# EAGLE board Board (EAGLE 8.2.2)
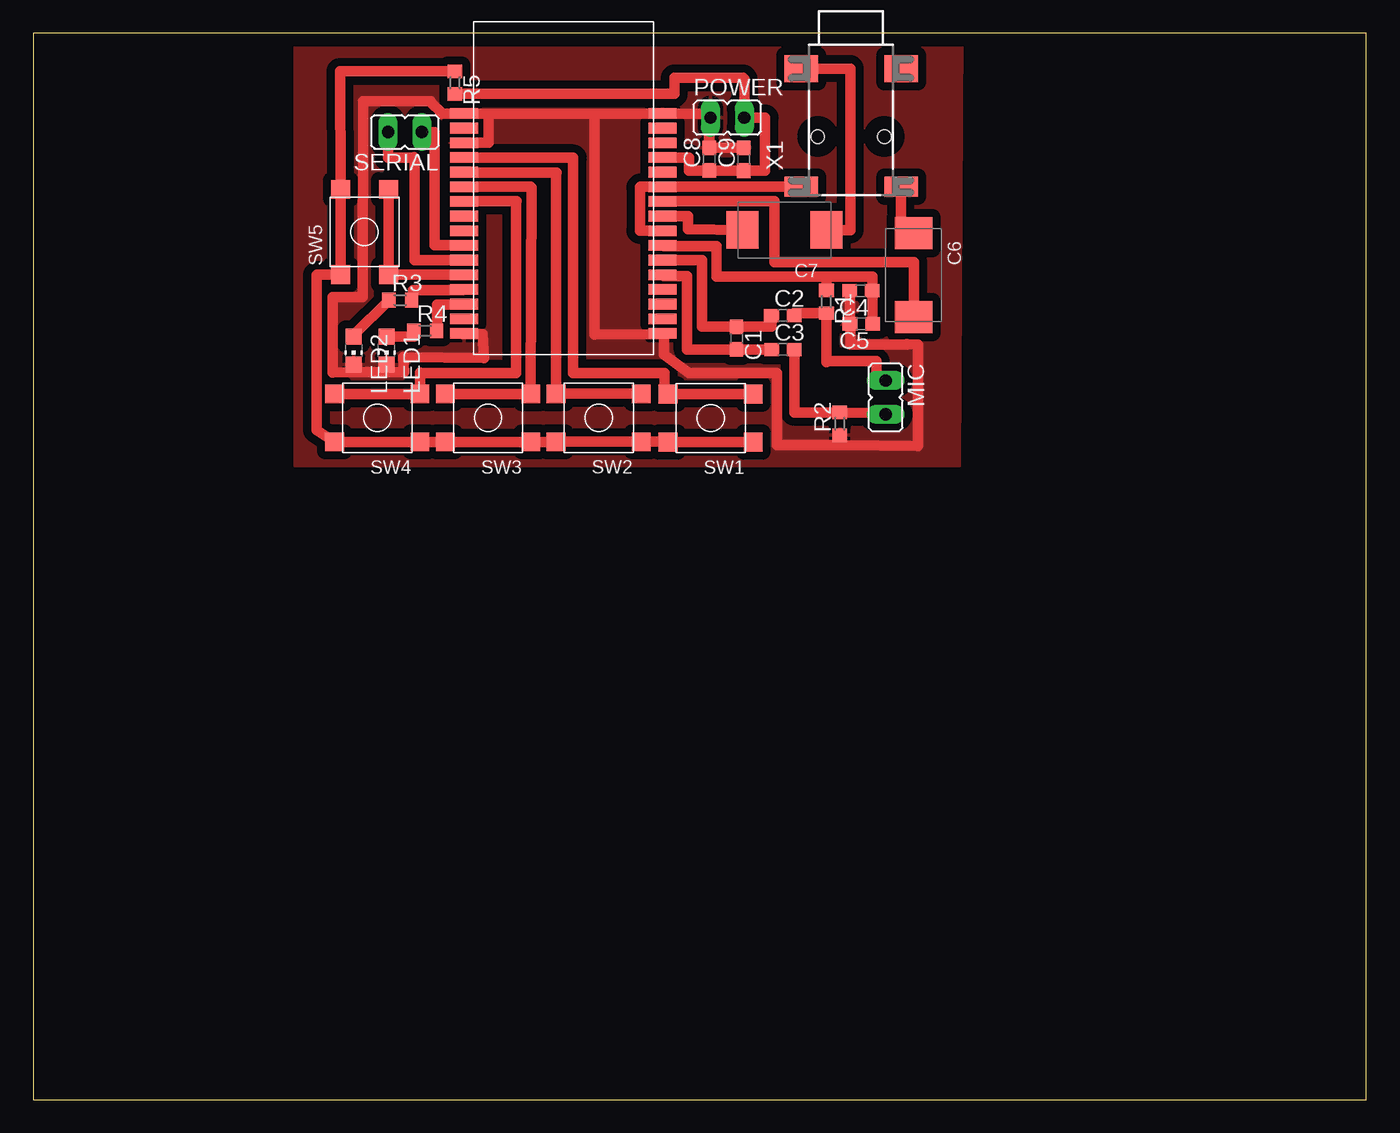
[diagram p0: board, top side]

Size 100 x 80 mm. Coordinates in mm from the lower left corner, seen from the top.
Outline: 0,0 100,0 100,80 0,80 0,0
Copper layers (1*16): Top 0.035mm / dielectric 1.5mm / Bottom 0.035mm
Design rules "default": minimum track width 6mil, minimum drill 0.35mm, track to track 6mil, track to pad 6mil, pad to pad 6mil, via to via 6mil, smd to smd 6mil, copper to edge 40mil, drill to drill 6mil, minimum pad ring 10mil, minimum via ring 8mil, stop-mask expansion 4mil, vias tented up to drill 0mil, thermal gap 10mil

## Footprints (pad centres in the part's own frame; a part is rotated, then mirrored left to right if it is on the bottom)
C0603 = smd 1.1 x 1: 1 -0.85,0; 2 0.85,0
SMC_D = smd 2.4 x 2.8: + -3.15,0; - 3.15,0
CHIP-LED0805 = smd 1.2 x 1.2: A 0,-1.05; C 0,1.05
JP1 = drill 0.914 long: 1 0,-1.27; 2 0,1.27
R0603 = smd 1 x 1.1: 1 -0.85,0; 2 0.85,0
BT4X4 = smd 1.4 x 1.4: 1 -1.8,3.2; 2 -1.8,-3.2; 3 1.8,3.2; 4 1.8,-3.2
BK8000L = smd 2.1 x 0.8: 3.0V_OUT 14.2,15.9; ANT -0.7,17; AUX_DET 14.2,2.7; AUX_L 14.2,4.9; AUX_R 14.2,3.8; GND#1 -0.7,18.1; GND#2 -0.7,15.9; GND#3 -0.7,1.6; GND#4 14.2,1.6; GND#5 14.2,18.1; LED0 -0.7,4.9; LED1 -0.7,3.8; LN 14.2,9.3; LP 14.2,10.4; MBISTEN -0.7,9.3; MIC_BIAS 14.2,8.2; MIC_N 14.2,6; MIC_P 14.2,7.1; MUTE -0.7,2.7; NEXT -0.7,12.6; P.P/CALL -0.7,6; PREV -0.7,11.5; RESET -0.7,10.4; RN 14.2,12.6; RP 14.2,11.5; RX -0.7,7.1; TX -0.7,8.2; VADC 14.2,17; VBAT 14.2,14.8; VBUS 14.2,13.7; VOL+ -0.7,14.8; VOL- -0.7,13.7
1503_02 = smd 2.5 x 1.5: 1 -3.75,-10.75; 3 3.75,-10.75 | smd 2.5 x 2: 2 -3.75,-1.9; 2@2 3.75,-1.9 | hole 1: -2.5,-7; 2.5,-7

## Placement (x,y rotation side)
C1  0.01uF_50V_10%_0603_X7R  [C0603]  52.76,57.13 270 top
C2  1uF_50V_5%_0603_X5R  [C0603]  56.23,58.82 0 top
C3  1uF_50V_5%_0603_X5R  [C0603]  56.24,56.27 0 top
C4  0.1uF_50V_5%_0603_X5R  [C0603]  62.09,60.69 180 top
C5  1uF_50V_5%_0603_X5R  [C0603]  62.12,58.2 180 top
C6  220uF 10V 10% D  [SMC_D]  66.05,61.86 270 top
C7  220uF 10V 10% D  [SMC_D]  56.35,65.25 180 top
C8  4.7uF_50V_5%_0603_X5R  [C0603]  50.71,70.56 90 top
C9  10nF_50V_5%_0603_X5R  [C0603]  53.31,70.55 90 top
LED1  LED BLUE SMD 0805  [CHIP-LED0805]  26.49,56.21 180 top
LED2  LED RED SMD 0805  [CHIP-LED0805]  24.04,56.21 180 top
MIC  [JP1]  63.95,52.68 180 top
POWER  [JP1]  52.07,73.66 270 top
R1  1.2KR_0603_1%  [R0603]  59.5,59.86 270 top
R2  1.2KR_0603_1%  [R0603]  60.5,50.7 90 top
R3  1KR_0603_1%  [R0603]  27.53,59.98 0 top
R4  1KR_0603_1%  [R0603]  29.41,57.68 0 top
R5  10KR_0603_1%  [R0603]  31.63,76.3 270 top
SERIAL  [JP1]  27.88,72.6 90 top
SW1  [BT4X4]  50.82,51.13 90 top
SW2  [BT4X4]  42.42,51.16 90 top
SW3  [BT4X4]  34.12,51.14 90 top
SW4  [BT4X4]  25.81,51.14 90 top
SW5  [BT4X4]  24.85,65.1 0 top
U$1  BK8000LBK8000L_PAD  [BK8000L]  33.02,55.88 0 top
X1  1503_02  [1503_02]  61.35,79.25 0 top

## Library data of the parts
C1-C5 C8 C9 = eagle-ltspice; SPICEMODEL: NONE; SPICEPREFIX: C
C6 C7 = resistor
LED1 LED2 = led
MIC POWER SERIAL = jumper
R1-R5 = eagle-ltspice; SPICEMODEL: NONE; SPICEPREFIX: R
SW1-SW5 = buttons
U$1 = BK8000L
X1 = con-lumberg; OC_FARNELL: 1216979; OC_NEWARK: unknown

## Nets
G: U$1.LN U$1.RN X1.1
GND: C4.2 C5.2 C8.2 C9.2 LED1.C LED2.C POWER.1 R2.1 U$1.GND#1 U$1.GND#2 U$1.GND#3 U$1.GND#4 U$1.GND#5
L: C7.+ X1.2
LED0: R3.2 U$1.LED0
LED1: R4.2 U$1.LED1
LP: C7.- U$1.LP
MIC_BIAS: C4.1 C5.1 R1.1 U$1.MIC_BIAS
MIC_N: C1.2 C3.1 U$1.MIC_N
MIC_P: C1.1 C2.1 U$1.MIC_P
N$1: LED1.A R4.1
N$2: LED2.A R3.1
N$3: R5.1 SW1.1 SW1.2 SW2.1 SW2.2 SW3.1 SW3.2 SW4.1 SW4.2 SW5.1 SW5.2
N$6: C3.2 MIC.2 R2.2
N$7: C2.2 MIC.1 R1.2
NEXT: SW3.3 SW3.4 U$1.NEXT
P.P/CALL: SW5.3 SW5.4 U$1.P.P/CALL
PREV: SW4.3 SW4.4 U$1.PREV
R: C6.+ X1.3
RP: C6.- U$1.RP
RX: SERIAL.2 U$1.RX
TX: SERIAL.1 U$1.TX
V3.3_SO: C8.1 C9.1 POWER.2 R5.2 U$1.VBAT
VOL+: SW1.3 SW1.4 U$1.VOL+
VOL-: SW2.3 SW2.4 U$1.VOL-

## Tracks (layer width: path | path; a pad name or v marks a point on that pad's centre or on a via)
G
  Top 0.8: U$1.LN 47.32,65.2 45.5,65.2 45.5,68.45 45.55,68.45 45.55,68.48 U$1.RN 57.6,68.48 X1.1
GND
  Top 0.8: C8.2 C9.2 | C8.2 50.71,73.75 50.48,73.98 U$1.GND#5 42.2,73.98 | 34.15,73.98 U$1.GND#1 30.65,73.98 30.65,74 29.8,74.85 29.8,74.9 24.75,74.9 24.7,60.2 22.45,60.2 22.45,54.55 24.29,54.57 | 34.15,73.98 42.2,73.98 | 34.15,73.98 34.15,71.8 32.22,71.8 U$1.GND#2 | 26.62,54.59 24.29,54.57 | 26.62,54.59 27.8,54.6 27.75,55.7 33.8,55.65 33.7,57.45 32.22,57.45 U$1.GND#3 | LED2.C 24.29,55.16 24.29,54.57 | LED1.C 26.62,55.16 26.62,54.59 | 42.2,73.98 42.1,73.93 42.1,57.4 47.32,57.45 | 47.32,57.45 U$1.GND#4 | 60.6,49.1 66.35,49.05 66.35,56.65 65.55,56.7 65.55,56.65 61.3,56.65 61.3,58.2 C5.2 61.27,60.69 C4.2 | 60.6,49.1 55.8,49.1 55.8,54.5 49.2,54.5 47.32,55.88 47.32,57.45 | POWER.1 50.72,73.66 C8.2 | R2.1 60.6,49.85 60.6,49.1
  pour Top (isolate 0.61): 19.55,79.35 19.55,47.5 69.55,47.5 69.75,80.25
L
  Top 0.8: C7.+ 61.3,65.25 61.3,77.35 X1.2
LED0
  Top 0.8: R3.2 28.5,59.98 28.5,60.75 32.22,60.75 U$1.LED0
LED1
  Top 0.8: R4.2 30.3,57.68 30.3,59.65 32.22,59.65 U$1.LED1
LP
  Top 0.8: U$1.LP 49.05,66.28 49.05,66.3 49.1,66.3 49.1,65.3 C7.-
MIC_BIAS
  Top 0.8: C5.1 62.94,58.2 C4.1 62.94,61.7 62.95,61.7 62.95,61.75 59.5,61.75 | R1.1 59.5,61.75 | 59.5,61.75 51.25,61.75 51.25,64.05 47.32,64.05 U$1.MIC_BIAS
MIC_N
  Top 0.8: C3.1 C1.2 49.05,56.28 49.05,61.8 47.32,61.8 U$1.MIC_N
MIC_P
  Top 0.8: U$1.MIC_P 50.15,62.98 50.15,58 52.76,58 C1.1 55.38,57.98 C2.1
N$1
  Top 0.8: LED1.A 28.56,57.26 R4.1
N$2
  Top 0.8: R3.1 24.04,57.34 LED2.A
N$3
  Top 0.8: SW1.2 SW1.1 47.62,49.36 SW2.2 SW2.1 39.22,49.34 SW3.2 SW3.1 SW4.2 SW4.1 21.26,50.24 21.25,50.25 21.25,61.85 21.3,61.9 SW5.2 SW5.1 23,77.15 R5.1
N$6
  Top 0.8: MIC.2 63.95,51.5 R2.2 57.09,51.55 C3.2
N$7
  Top 0.8: C2.2 57.08,59.01 R1.2 59.5,55.4 | MIC.1 63.25,54.05 63.25,55.4 59.5,55.4 | 59.5,55.4 59.5,55.35
NEXT
  Top 0.8: SW3.3 SW3.4 37.37,68.43 37.3,68.5 32.24,68.5 U$1.NEXT
P.P/CALL
  Top 0.8: SW5.3 SW5.4 32.22,61.9 U$1.P.P/CALL
PREV
  Top 0.8: U$1.PREV 32.24,67.4 36.25,67.4 36.2,67.35 36.2,54.5 29,54.5 29.01,54.54 SW4.4 SW4.3
R
  Top 0.8: C6.+ 65.1,65.01 X1.3
RP
  Top 0.8: C6.- 66.05,62.85 55.6,62.85 55.6,67.4 47.32,67.4 U$1.RP
RX
  Top 0.8: SERIAL.2 26.6,70.65 28.55,70.65 28.55,70.7 28.6,70.65 28.6,63 32.22,63 U$1.RX
TX
  Top 0.8: SERIAL.1 30.1,72.6 30.1,64.1 32.2,64.1 U$1.TX
V3.3_SO
  Top 0.8: U$1.VBAT 49.17,70.68 49.2,70.65 49.2,69.7 C8.1 C9.1 54.9,69.7 54.9,73.65 POWER.2 | POWER.2 | R5.2 48.1,75.45 48.1,76.65 53.25,76.65 53.35,76.55 POWER.2
VOL+
  Top 0.8: SW1.4 SW1.3 47.35,52.93 47.35,54.5 40.5,54.5 40.5,70.65 32.22,70.65 U$1.VOL+
VOL-
  Top 0.8: SW2.4 SW2.3 39.22,69.53 39.25,69.55 32.25,69.55 U$1.VOL-